# EAGLE board Copy (EAGLE 9.1.2)
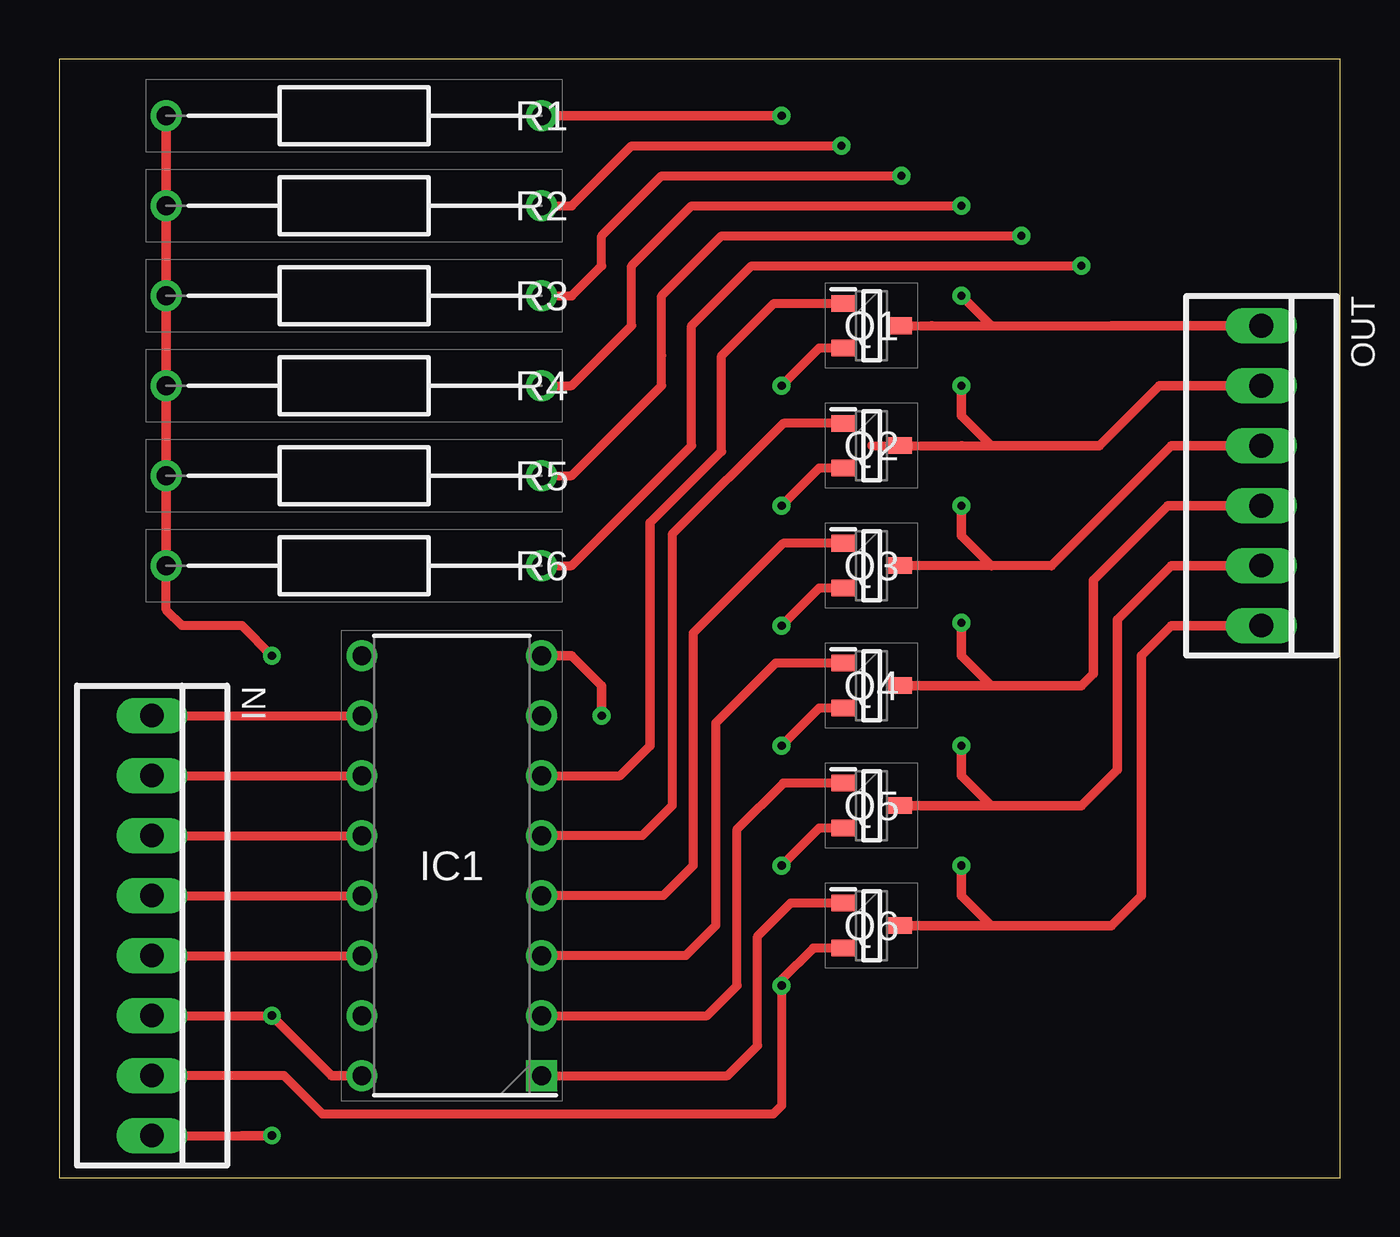
[diagram p0: board, top side]
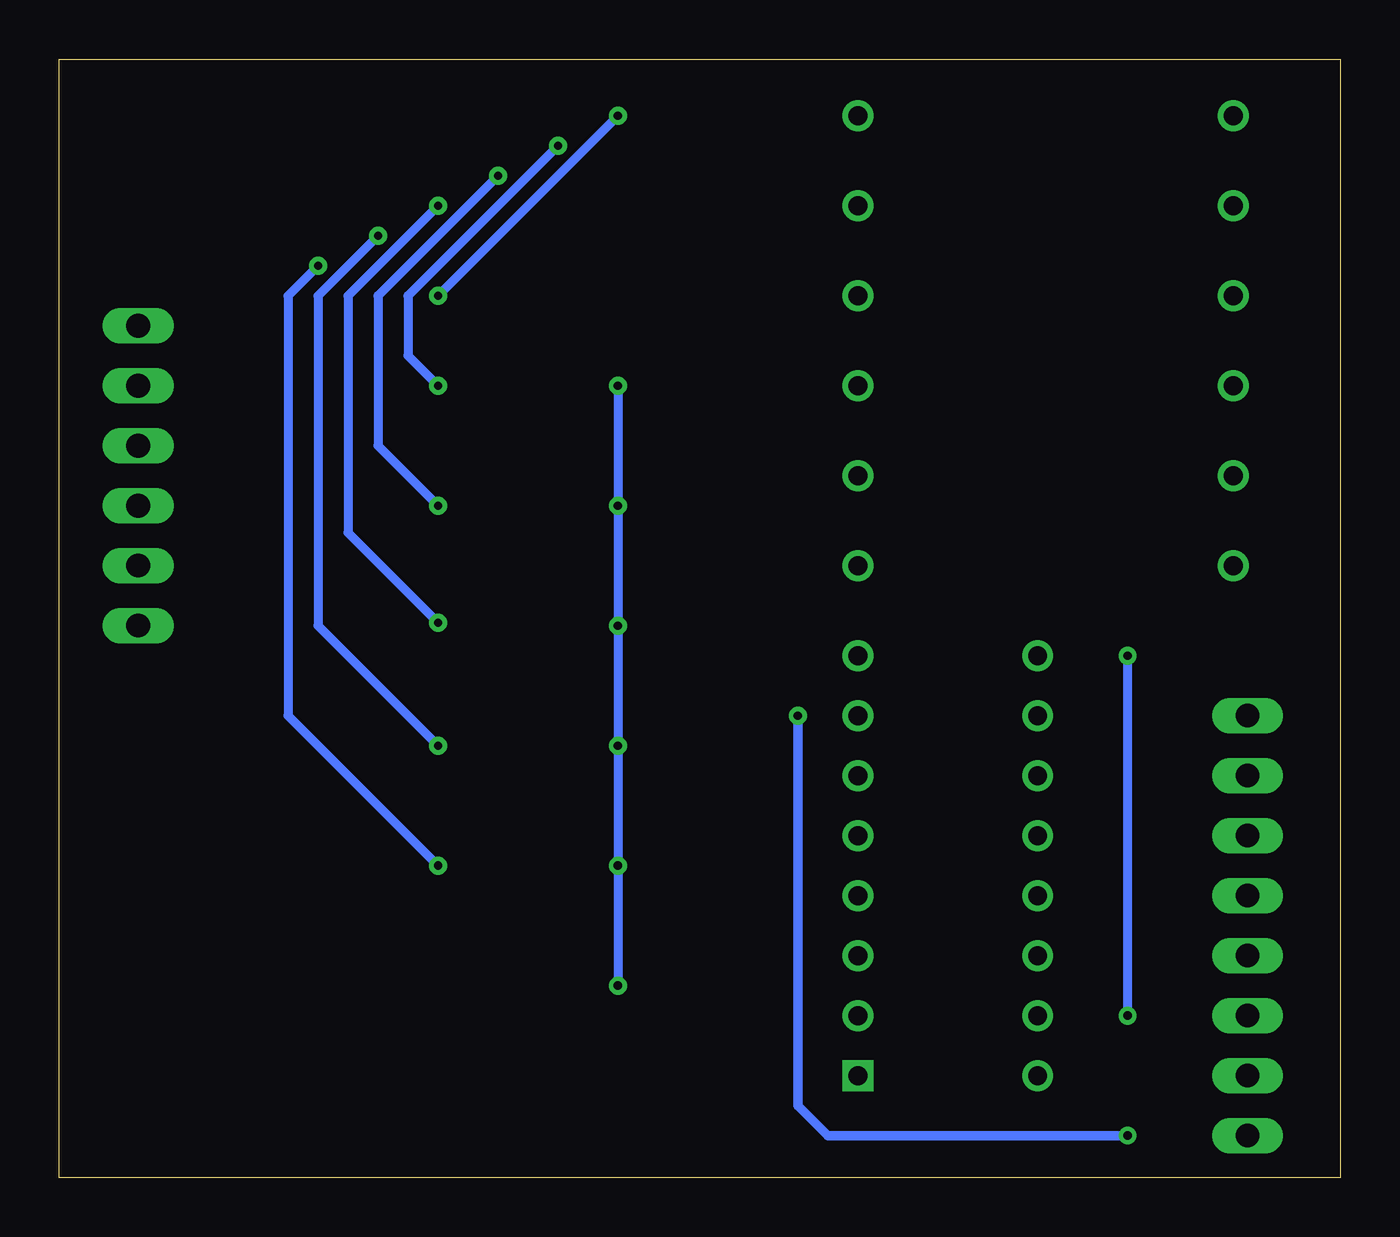
[diagram p1: board, bottom side, seen from below]

Size 54.28 x 47.36 mm. Coordinates in mm from the lower left corner, seen from the top.
Outline: 0,0 54.28,0 54.28,47.36 0,47.36 0,0
Copper layers (1*16): Top 0.035mm / dielectric 1.5mm / Bottom 0.035mm
Design rules "default": minimum track width 6mil, minimum drill 0.35mm, track to track 6mil, track to pad 6mil, pad to pad 6mil, via to via 6mil, smd to smd 6mil, copper to edge 40mil, drill to drill 6mil, minimum pad ring 10mil, minimum via ring 8mil, stop-mask expansion 4mil, vias tented up to drill 0mil, thermal gap 10mil

## Footprints (pad centres in the part's own frame; a part is rotated, then mirrored left to right if it is on the bottom)
DIP762W60P254L1925H445Q16N = drill 0.8 pad 1.2 square: 1 -3.81,8.89 | drill 0.8 pad 1.2: 2 -3.81,6.35; 3 -3.81,3.81; 4 -3.81,1.27; 5 -3.81,-1.27; 6 -3.81,-3.81; 7 -3.81,-6.35; 8 -3.81,-8.89; 9 3.81,-8.89; 10 3.81,-6.35; 11 3.81,-3.81; 12 3.81,-1.27; 13 3.81,1.27; 14 3.81,3.81; 15 3.81,6.35; 16 3.81,8.89
22-23-2081 = drill 1 long: 1 -8.89,0; 2 -6.35,0; 3 -3.81,0; 4 -1.27,0; 5 1.27,0; 6 3.81,0; 7 6.35,0; 8 8.89,0
22-23-2061 = drill 1 long: 1 -6.35,0; 2 -3.81,0; 3 -1.27,0; 4 1.27,0; 5 3.81,0; 6 6.35,0
SOT95P240X120-3N = smd 1 x 0.7: 1 -1.2,0.95; 2 -1.2,-0.95; 3 1.2,0
RESAD1590W60L630D240 = drill 0.8 pad 1.2: 1 0,0; 2 15.9,0

## Placement (x,y rotation side)
IC1  TC74HC595AP(F)  [DIP762W60P254L1925H445Q16N]  16.64,13.21 180 top
IN  22-23-2081  [22-23-2081]  3.94,10.67 270 top
OUT  [22-23-2061]  50.93,29.72 270 top
Q1  BSS138  [SOT95P240X120-3N]  34.42,36.07 0 top
Q2  BSS138  [SOT95P240X120-3N]  34.42,30.99 0 top
Q3  BSS138  [SOT95P240X120-3N]  34.42,25.91 0 top
Q4  BSS138  [SOT95P240X120-3N]  34.42,20.83 0 top
Q5  BSS138  [SOT95P240X120-3N]  34.42,15.75 0 top
Q6  BSS138  [SOT95P240X120-3N]  34.42,10.67 0 top
R1  CFR-25JB-52-2K2  [RESAD1590W60L630D240]  20.45,44.96 180 top
R2  CFR-25JB-52-2K2  [RESAD1590W60L630D240]  20.45,41.15 180 top
R3  CFR-25JB-52-2K2  [RESAD1590W60L630D240]  20.45,37.34 180 top
R4  CFR-25JB-52-2K2  [RESAD1590W60L630D240]  20.45,33.53 180 top
R5  CFR-25JB-52-2K2  [RESAD1590W60L630D240]  20.45,29.72 180 top
R6  CFR-25JB-52-2K2  [RESAD1590W60L630D240]  20.45,25.91 180 top

## Library data of the parts
IC1 = TC74HC595AP(F); DESCRIPTION: IC,CMOS logic,DIP16,SHIFT REGISTERS; HEIGHT: 4.45mm; MANUFACTURER_NAME: Toshiba; MANUFACTURER_PART_NUMBER: TC74HC595AP(F); MOUSER_PART_NUMBER: N/A; MOUSER_PRICE-STOCK: https://www.mouser.com/Search/Refine.aspx?Keyword=N%2FA; RS_PART_NUMBER: 5400095P; RS_PRICE-STOCK: http://au.rs-online.com/web/p/products/5400095P
IN = con-molex; MF: MOLEX; MPN: 22-23-2081; OC_FARNELL: 1756826; OC_NEWARK: 01C7592
OUT = con-molex; MF: MOLEX; MPN: 22-23-2061; OC_FARNELL: 1462922; OC_NEWARK: 27C1933
Q1-Q6 = BSS138; DESCRIPTION: N-channel MOSFET,BSS138 0.2A 50V; HEIGHT: 1.2mm; MANUFACTURER_NAME: ON Semiconductor; MANUFACTURER_PART_NUMBER: BSS138; MOUSER_PART_NUMBER: 512-BSS138; RS_PART_NUMBER: 1241694; RS_PRICE-STOCK: http://uk.rs-online.com/web/p/products/1241694
R1-R6 = CFR-25JB-52-2K2; DESCRIPTION: Carbon Film Resistors - Through Hole 1/4W 2.2K Ohm 5%; HEIGHT: mm; MANUFACTURER_NAME: YAGEO (PHYCOMP); MANUFACTURER_PART_NUMBER: CFR-25JB-52-2K2; MOUSER_PART_NUMBER: 603-CFR-25JB-52-2K2; MOUSER_PRICE-STOCK: https://www.mouser.com/Search/Refine.aspx?Keyword=603-CFR-25JB-52-2K2; RS_PART_NUMBER: 603-CFR-25JB-52-2K2; RS_PRICE-STOCK: https://www.mouser.com/Search/Refine.aspx?Keyword=603-CFR-25JB-52-2K2

## Nets
GND: IC1.8 IN.8
N$1: IN.7 Q1.2 Q2.2 Q3.2 Q4.2 Q5.2 Q6.2
N$2: IC1.1 Q6.1
N$3: IC1.3 Q4.1
N$4: IC1.2 Q5.1
N$5: IC1.6 Q1.1
N$6: IC1.5 Q2.1
N$7: IC1.4 Q3.1
N$8: IC1.10 IN.1
N$9: IC1.11 IN.2
N$10: IC1.12 IN.3
N$11: IC1.13 IN.4
N$12: IC1.14 IN.5
N$13: IC1.16 IN.6 R1.2 R2.2 R3.2 R4.2 R5.2 R6.2
N$14: OUT.1 Q1.3 R1.1
N$15: OUT.2 Q2.3 R2.1
N$16: OUT.3 Q3.3 R3.1
N$17: OUT.4 Q4.3 R4.1
N$18: OUT.5 Q5.3 R5.1
N$19: OUT.6 Q6.3 R6.1

## Tracks (layer width: path | path; a pad name or v marks a point on that pad's centre or on a via)
GND  (via drill 0.35)
  Top 0.381: IN.8 7.75,1.78
  Top 0.406: 7.75,1.78 v9.02,1.78 | IC1.8 21.72,22.1 22.99,20.83 v22.99,19.56
  Bottom 0.406: v9.02,1.78 21.72,1.78 22.99,3.05 v22.99,19.56
N$1  (via drill 0.35)
  Top 0.381: IN.7 9.53,4.32 11.17,2.69 30.24,2.69 30.61,3.05 v30.61,8.13 30.61,8.38 31.95,9.72 Q6.2 | Q2.2 32.2,30.04 v30.61,28.45 | Q3.2 32.2,24.96 v30.61,23.37 | Q4.2 32.2,19.88 v30.61,18.29 | Q5.2 32.2,14.8 v30.61,13.21 | Q1.2 32.2,35.12 v30.61,33.53
  Bottom 0.381: v30.61,33.53 v30.61,28.45 v30.61,23.37 v30.61,18.29 v30.61,13.21 v30.61,8.13
N$2
  Top 0.381: Q6.1 30.99,11.62 29.59,10.22 29.59,5.59 28.32,4.32 IC1.1
N$3
  Top 0.381: Q4.1 30.35,21.78 27.81,19.24 27.81,10.67 26.54,9.4 IC1.3
N$4
  Top 0.381: Q5.1 30.68,16.7 28.73,14.75 28.73,8.13 27.46,6.86 IC1.2
N$5
  Top 0.381: 25.04,18.29 23.77,17.02 IC1.6 | 25.04,27.72 28.07,30.74 28.07,34.8 30.29,37.02 Q1.1
  Top 0.406: 25.04,18.29 25.04,24.64 25.04,27.72
N$6
  Top 0.381: Q2.1 30.68,31.94 25.97,27.23 25.97,15.75 24.7,14.48 IC1.5
N$7
  Top 0.381: Q3.1 30.67,26.86 26.86,23.05 26.86,13.21 25.59,11.94 IC1.4
N$8
  Top 0.381: IN.1 IC1.10
N$9
  Top 0.381: IN.2 IC1.11
N$10
  Top 0.381: IN.3 IC1.12
N$11
  Top 0.381: IN.4 IC1.13
N$12
  Top 0.381: IN.5 IC1.14
N$13  (via drill 0.35)
  Top 0.381: IN.6 v9.02,6.86 | R6.2 4.55,24.03 5.21,23.37 7.75,23.37 v9.02,22.1
  Top 0.406: R6.2 R5.2 R4.2 R3.2 R2.2 R1.2 | v9.02,6.86 11.56,4.32 IC1.16
  Bottom 0.381: v9.02,6.86 v9.02,22.1
N$14  (via drill 0.35)
  Top 0.381: Q1.3 36.96,36.07 39.5,36.07 | 39.5,36.07 44.58,36.07 | v38.23,37.34 39.5,36.07
  Top 0.406: 44.58,36.07 OUT.1 | v30.61,44.96 R1.1
  Bottom 0.381: v30.61,44.96 v38.23,37.34
N$15  (via drill 0.35)
  Top 0.381: Q2.3 38.23,30.99 | 38.23,30.99 39.5,30.99 | R2.1 21.72,41.15 24.26,43.69 v33.15,43.69 | 34.42,30.99 38.23,30.99
  Top 0.406: OUT.2 46.61,33.53 44.07,30.99 39.5,30.99 38.23,32.26 v38.23,33.53
  Bottom 0.381: 39.5,37.34 39.5,34.8 v38.23,33.53
  Bottom 0.406: v33.15,43.69 39.5,37.34
N$16  (via drill 0.35)
  Top 0.381: R3.1 21.72,37.34 22.99,38.61 22.99,39.88 25.53,42.42 v35.69,42.42 | 42.04,25.91 39.5,25.91 Q3.3
  Top 0.406: OUT.3 47.12,30.99 42.04,25.91 | v38.23,28.45 38.23,27.18 39.5,25.91
  Bottom 0.381: 40.77,37.34 40.77,30.99 v38.23,28.45
  Bottom 0.406: v35.69,42.42 40.77,37.34
N$17  (via drill 0.35)
  Top 0.381: R4.1 21.72,33.53 | 35.69,20.83 Q4.3 | 29.34,41.15 30.61,41.15 | 30.61,41.15 v38.23,41.15 | 21.72,33.53 | 21.72,33.53 22.99,34.8 24.26,36.07 24.26,38.61 26.8,41.15 30.61,41.15
  Top 0.406: OUT.4 46.96,28.45 43.81,25.3 43.81,21.34 43.31,20.83 39.5,20.83 | 39.5,20.83 35.69,20.83 | v38.23,23.5 38.23,22.1 39.5,20.83
  Bottom 0.381: v38.23,41.15 42.04,37.34 42.04,27.3 v38.23,23.5
N$18  (via drill 0.35)
  Top 0.381: R5.1 21.72,29.72 25.53,33.53 25.53,34.8 25.53,37.34 28.07,39.88 v40.77,39.88
  Top 0.406: OUT.5 47.12,25.91 44.83,23.62 44.83,17.27 43.31,15.75 39.5,15.75 | 39.5,15.75 Q5.3 | v38.23,18.29 38.23,17.02 39.5,15.75
  Bottom 0.381: v38.23,18.29 43.31,23.37 43.31,37.34 v40.77,39.88
N$19  (via drill 0.35)
  Top 0.381: 20.77,25.91 R6.1 21.72,25.91 26.8,30.99 26.8,36.07 29.34,38.61 34.42,38.61 | 35.69,10.67 Q6.3 | 33.47,38.61 34.42,38.61 | 34.42,38.61 v43.31,38.61
  Top 0.406: OUT.6 47.12,23.37 45.85,22.1 45.85,11.94 44.58,10.67 43.31,10.67 39.5,10.67 | 39.5,10.67 35.69,10.67 | v38.23,13.21 38.23,11.94 39.5,10.67
  Bottom 0.381: v43.31,38.61 44.58,37.34 44.58,19.56 v38.23,13.21